# Altium PCB TU_ADV_PCB.PcbDoc (part 1 of 2)
Units mm, origin at the board's own origin, x right, y up, seen from the top; angles counter-clockwise.
Board outline 184 x 161.42 mm, 2 copper layers (Top Layer, Bottom Layer); 166 components, 184 nets, 467 pads, 141 vias.
Unrouted connection lines stored in the file: 268.
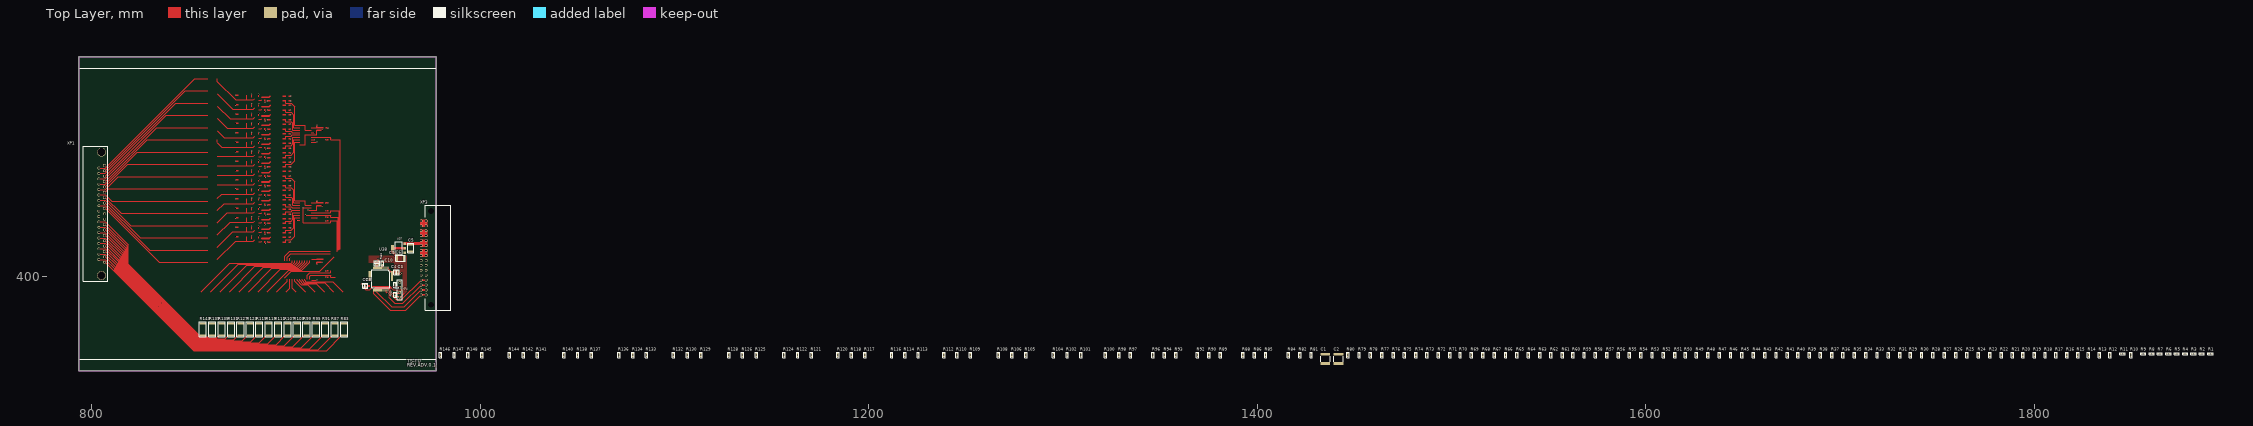
[diagram p0: Top Layer view]
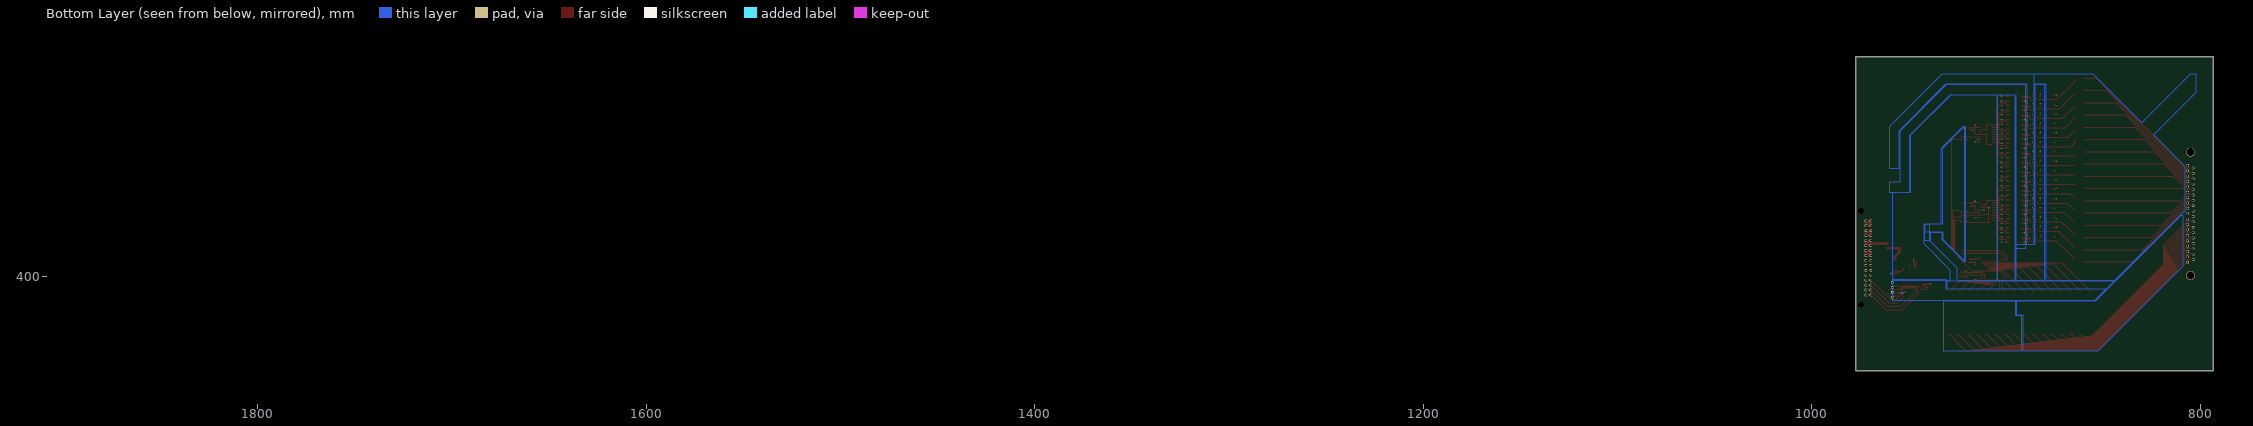
[diagram p1: Bottom Layer view, seen from below]

## Layer stack, top to bottom
Top Solder: solder mask 0.0102, Solder Resist, Dk 3.5
Top Layer: signal copper 0.0356
Dielectric 1: dielectric 0.32, FR-4, Dk 4.8
Bottom Layer: signal copper 0.0356
Bottom Solder: solder mask 0.0102, Solder Resist, Dk 3.5

## Board outline
793.56,351.548 793.56,512.971 977.56,512.971 977.56,352.698 977.56,351.548

## Design rules (kind name [scope] priority, off if disabled: settings)
BoardOutlineClearance [All] p1: gap=0.3 ignorepadtopadclearanceinfootprint=FALSE
Clearance Clearance_MultiLayerPad [OnLayer('Multi-Layer') and IsPad] p1: gap=0.2 ignorepadtopadclearanceinfootprint=FALSE except(0: Arc-Hole Track-Hole SMDPad-Hole THPad-Hole Via-Hole Fill-Hole Poly-Hole Region-Hole Text-Hole)
Clearance Clearance_Polygon [InPolygon] p2: gap=0.1 ignorepadtopadclearanceinfootprint=FALSE except(0: Arc-Hole Track-Hole SMDPad-Hole THPad-Hole Via-Hole Fill-Hole Poly-Hole Region-Hole Text-Hole)
Clearance [All] p3: gap=0.1 ignorepadtopadclearanceinfootprint=FALSE except(0: Arc-Hole Track-Hole SMDPad-Hole THPad-Hole Via-Hole Fill-Hole Poly-Hole Region-Hole Text-Hole)
ComponentClearance [All] p1: gap=0.5 collisioncheckmode=3 verticalgap=0.5 showdistances=FALSE
DiffPairsRouting [All] p1: maxlimit=0.3 minlimit=0.1 mostfreqgap=0.15 toplayer_minwidth=0.1 toplayer_maxwidth=0.3 toplayer_prefwidth=0.15 bottomlayer_minwidth=0.1 bottomlayer_maxwidth=0.3 bottomlayer_prefwidth=0.15 maxuncoupledlength=12.7
Height [All] p1: minheight=0 maxheight=50 prefheight=12.7
HoleSize [All] p1: absolutevalues=TRUE maxlimit=10 minlimit=0.3 maxpercent=80.000 minpercent=20.000
HoleToHoleClearance [All] p1: gap=0.3 allowstackedmicrovias=TRUE
MinimumSolderMaskSliver [All] p1: minsoldermaskwidth=0.2
PlaneClearance [All] p1: clearance=0.5
PlaneConnect [All] p1: planeconnectstyle=Relief reliefexpansion=0.5 reliefentries=4 reliefconductorwidth=0.2 reliefairgap=0.2
PolygonConnect PolygonConnect_PadGND [InNet('GND') and IsPad] p1: connectstyle=Relief reliefconductorwidth=0.2 reliefentries=4 polygonreliefangle="90 Angle" airgapwidth=0.2
PolygonConnect PolygonConnect_Via [IsVia] p2: connectstyle=Direct reliefconductorwidth=0.254 reliefentries=4 polygonreliefangle="90 Angle" airgapwidth=0.254
PolygonConnect [All] p3: connectstyle=Relief reliefconductorwidth=0.2 reliefentries=4 polygonreliefangle="90 Angle" airgapwidth=0.2
RoutingVias [All] p1: holewidth=0.2 width=0.4 viastyle="Through Hole" minholewidth=0.2 minwidth=0.4 maxholewidth=0.5 maxwidth=1.2
SilkToSolderMaskClearance [IsPad] p1: minsilkscreentomaskgap=0.2 clearancetoexposedcopper=TRUE
SolderMaskExpansion [All] p1: expansion=0.075 istentingtop=FALSE
Width [All] p1: maxlimit=10 minlimit=0.1 preferedwidth=0.1
21 further rules are at their usual default settings.

## Classes and differential pairs
component class U_TU_PWR: C3 C4 C5 C6 C7 C8 C9 C10 U37 XP3
component class U_TU_MCU: R149 R150 R151 U38 XP4

## Components (designator, comment, footprint, x,y, rotation, side; value= is the part's Value field where it differs from the comment)
C1 "" "CAP: 2220" 1435.067,359.969 r0 top value="10uF, 25V, X7R"
C2 "" "CAP: 2220" 1441.827,359.969 r0 top value="10uF, 25V, X7R"
C3 "Cap_0603" "CAP: 0603" 957.756,402.25 r90 top value=4.7μF
C4 "Cap_0603" "CAP: 0603" 956.306,402.25 r90 top value=0.1μF
C5 "Ceramic capacitor, 10μF, X7R, ±10%, , 1210, -55...+125°C" "CAP: 1210" 964.281,414.639 r90 top value=10μF
C6 "Ceramic capacitor, 10μF, X7R, ±10%, , 1210, -55...+125°C" "CAP: 1210" 959.031,409.389 r180 top value=10μF
C7 "Cap_0603" "CAP: 0603" 940.106,395.25 r270 top value=4.7μF
C8 "Cap_0603" "CAP: 0603" 941.556,395.25 r270 top value=0.1μF
C9 "Cap_0603" "CAP: 0603" 946.931,407.575 r180 top value=4.7μF
C10 "Cap_0603" "CAP: 0603" 946.931,406.125 r180 top value=0.1μF
R1 "" "RES: 0603" 1890.586,360.229 r0 top value=10K
R2 "" "RES: 0603" 1886.166,360.229 r0 top value=2K
R3 "" "RES: 0603" 1881.876,360.229 r0 top value=1K
R4 "" "RES: 0603" 1877.586,360.229 r0 top value=10K
R5 "" "RES: 0603" 1873.296,360.229 r0 top value=10K
R6 "" "RES: 0603" 1869.006,360.229 r0 top value=10K
R7 "" "RES: 0603" 1864.586,360.229 r0 top value=2K
R8 "" "RES: 0603" 1860.296,360.229 r0 top value=1K
R9 "" "RES: 0603" 1856.006,360.229 r0 top value=10K
R10 "" "RES: 0603" 1849.766,359.579 r90 top value=10K
R11 "" "RES: 0603" 1845.346,360.229 r0 top value=10K
R12 "" "RES: 0603" 1838.976,359.579 r90 top value=2K
R13 "" "RES: 0603" 1833.516,359.579 r90 top value=1K
R14 "" "RES: 0603" 1827.926,359.579 r90 top value=10K
R15 "" "RES: 0603" 1822.336,359.579 r90 top value=10K
R16 "" "RES: 0603" 1816.746,359.579 r90 top value=10K
R17 "" "RES: 0603" 1811.156,359.579 r90 top value=2K
R18 "" "RES: 0603" 1805.566,359.579 r90 top value=1K
R19 "" "RES: 0603" 1799.976,359.579 r90 top value=10K
R20 "" "RES: 0603" 1794.126,359.579 r90 top value=10K
R21 "" "RES: 0603" 1788.796,359.579 r90 top value=10K
R22 "" "RES: 0603" 1782.946,359.579 r90 top value=2K
R23 "" "RES: 0603" 1777.096,359.579 r90 top value=1K
R24 "" "RES: 0603" 1771.246,359.579 r90 top value=10K
R25 "" "RES: 0603" 1765.396,359.579 r90 top value=10K
R26 "" "RES: 0603" 1759.546,359.579 r90 top value=10K
R27 "" "RES: 0603" 1753.696,359.579 r90 top value=2K
R28 "" "RES: 0603" 1747.847,359.579 r90 top value=1K
R29 "" "RES: 0603" 1736.147,359.579 r90 top value=10K
R30 "" "RES: 0603" 1741.997,359.579 r90 top value=10K
R31 "" "RES: 0603" 1730.817,359.579 r90 top value=10K
R32 "" "RES: 0603" 1724.967,359.579 r90 top value=2K
R33 "" "RES: 0603" 1719.117,359.579 r90 top value=1K
R34 "" "RES: 0603" 1713.267,359.579 r90 top value=10K
R35 "" "RES: 0603" 1707.417,359.579 r90 top value=10K
R36 "" "RES: 0603" 1701.567,359.579 r90 top value=10K
R37 "" "RES: 0603" 1695.847,359.579 r90 top value=2K
R38 "" "RES: 0603" 1689.997,359.579 r90 top value=1K
R39 "" "RES: 0603" 1684.147,359.579 r90 top value=10K
R40 "" "RES: 0603" 1678.297,359.579 r90 top value=10K
R41 "" "RES: 0603" 1672.967,359.579 r90 top value=10K
R42 "" "RES: 0603" 1667.117,359.579 r90 top value=2K
R43 "" "RES: 0603" 1661.267,359.579 r90 top value=1K
R44 "" "RES: 0603" 1655.417,359.579 r90 top value=10K
R45 "" "RES: 0603" 1649.567,359.579 r90 top value=10K
R46 "" "RES: 0603" 1643.717,359.579 r90 top value=10K
R47 "" "RES: 0603" 1637.867,359.579 r90 top value=2K
R48 "" "RES: 0603" 1632.017,359.579 r90 top value=1K
R49 "" "RES: 0603" 1626.167,359.579 r90 top value=10K
R50 "" "RES: 0603" 1620.317,359.579 r90 top value=10K
R51 "" "RES: 0603" 1614.987,359.579 r90 top value=10K
R52 "" "RES: 0603" 1609.137,359.579 r90 top value=2K
R53 "" "RES: 0603" 1603.287,359.579 r90 top value=1K
R54 "" "RES: 0603" 1597.437,359.579 r90 top value=10K
R55 "" "RES: 0603" 1591.587,359.579 r90 top value=10K
R56 "" "RES: 0603" 1585.867,359.579 r90 top value=10K
R57 "" "RES: 0603" 1580.017,359.579 r90 top value=2K
R58 "" "RES: 0603" 1574.167,359.579 r90 top value=1K
R59 "" "RES: 0603" 1568.317,359.579 r90 top value=10K
R60 "" "RES: 0603" 1562.467,359.579 r90 top value=10K
R61 "" "RES: 0603" 1557.137,359.579 r90 top value=10K
R62 "" "RES: 0603" 1551.287,359.579 r90 top value=2K
R63 "" "RES: 0603" 1545.437,359.579 r90 top value=1K
R64 "" "RES: 0603" 1539.587,359.579 r90 top value=10K
R65 "" "RES: 0603" 1533.737,359.579 r90 top value=10K
R66 "" "RES: 0603" 1527.887,359.579 r90 top value=10K
R67 "" "RES: 0603" 1522.037,359.579 r90 top value=2K
R68 "" "RES: 0603" 1516.187,359.579 r90 top value=1K
R69 "" "RES: 0603" 1510.337,359.579 r90 top value=10K
R70 "" "RES: 0603" 1504.487,359.579 r90 top value=10K
R71 "" "RES: 0603" 1499.157,359.579 r90 top value=10K
R72 "" "RES: 0603" 1493.307,359.579 r90 top value=2K
R73 "" "RES: 0603" 1487.457,359.579 r90 top value=1K
R74 "" "RES: 0603" 1481.737,359.579 r90 top value=10K
R75 "" "RES: 0603" 1475.887,359.579 r90 top value=10K
R76 "" "RES: 0603" 1470.037,359.579 r90 top value=10K
R77 "" "RES: 0603" 1464.187,359.579 r90 top value=2K
R78 "" "RES: 0603" 1458.337,359.579 r90 top value=1K
R79 "" "RES: 0603" 1452.487,359.579 r90 top value=10K
R80 "" "RES: 0603" 1446.637,359.579 r90 top value=10K
R81 "" "RES: 0603" 1427.787,359.579 r90 top value=10K
R82 "" "RES: 0603" 1421.937,359.579 r90 top value=10K
R83 "" "RES: 2512" 930.061,372.806 r90 top value=2K
R84 "" "RES: 0603" 1416.087,359.579 r90 top value=1K
R85 "" "RES: 0603" 1404.387,359.579 r90 top value=10K
R86 "" "RES: 0603" 1398.537,359.579 r90 top value=10K
R87 "" "RES: 2512" 925.211,372.806 r90 top value=2K
R88 "" "RES: 0603" 1392.687,359.579 r90 top value=1K
R89 "" "RES: 0603" 1380.987,359.579 r90 top value=10K
R90 "" "RES: 0603" 1375.137,359.579 r90 top value=10K
R91 "" "RES: 2512" 920.361,372.806 r90 top value=2K
R92 "" "RES: 0603" 1369.287,359.579 r90 top value=1K
R93 "" "RES: 0603" 1358.107,359.579 r90 top value=10K
R94 "" "RES: 0603" 1352.257,359.579 r90 top value=10K
R95 "" "RES: 2512" 915.511,372.806 r90 top value=2K
R96 "" "RES: 0603" 1346.407,359.579 r90 top value=1K
R97 "" "RES: 0603" 1334.707,359.579 r90 top value=10K
R98 "" "RES: 0603" 1328.857,359.579 r90 top value=10K
R99 "" "RES: 2512" 910.661,372.806 r90 top value=2K
R100 "" "RES: 0603" 1321.837,359.579 r90 top value=1K
R101 "" "RES: 0603" 1309.357,359.579 r90 top value=10K
R102 "" "RES: 0603" 1302.207,359.579 r90 top value=10K
R103 "" "RES: 2512" 905.811,372.806 r90 top value=2K
R104 "" "RES: 0603" 1295.187,359.579 r90 top value=1K
R105 "" "RES: 0603" 1280.887,359.579 r90 top value=10K
R106 "" "RES: 0603" 1273.737,359.579 r90 top value=10K
R107 "" "RES: 2512" 900.961,372.806 r90 top value=2K
R108 "" "RES: 0603" 1266.717,359.579 r90 top value=1K
R109 "" "RES: 0603" 1252.417,359.579 r90 top value=10K
R110 "" "RES: 0603" 1245.528,359.579 r90 top value=10K
R111 "" "RES: 2512" 896.111,372.806 r90 top value=2K
R112 "" "RES: 0603" 1238.768,359.579 r90 top value=1K
R113 "" "RES: 0603" 1225.508,359.579 r90 top value=10K
R114 "" "RES: 0603" 1218.618,359.579 r90 top value=10K
R115 "" "RES: 2512" 891.261,372.806 r90 top value=2K
R116 "" "RES: 0603" 1211.858,359.579 r90 top value=1K
R117 "" "RES: 0603" 1198.078,359.579 r90 top value=10K
R118 "" "RES: 0603" 1191.188,359.579 r90 top value=10K
R119 "" "RES: 2512" 886.411,372.806 r90 top value=2K
R120 "" "RES: 0603" 1184.168,359.579 r90 top value=1K
R121 "" "RES: 0603" 1170.648,359.579 r90 top value=10K
R122 "" "RES: 0603" 1163.498,359.579 r90 top value=10K
R123 "" "RES: 2512" 881.561,372.806 r90 top value=2K
R124 "" "RES: 0603" 1156.478,359.579 r90 top value=1K
R125 "" "RES: 0603" 1142.178,359.579 r90 top value=10K
R126 "" "RES: 0603" 1135.028,359.579 r90 top value=10K
R127 "" "RES: 2512" 876.711,372.806 r90 top value=2K
R128 "" "RES: 0603" 1128.008,359.579 r90 top value=1K
R129 "" "RES: 0603" 1113.708,359.579 r90 top value=10K
R130 "" "RES: 0603" 1106.688,359.579 r90 top value=10K
R131 "" "RES: 2512" 871.861,372.806 r90 top value=2K
R132 "" "RES: 0603" 1099.538,359.579 r90 top value=1K
R133 "" "RES: 0603" 1085.758,359.579 r90 top value=10K
R134 "" "RES: 0603" 1078.738,359.579 r90 top value=10K
R135 "" "RES: 2512" 867.011,372.806 r90 top value=2K
R136 "" "RES: 0603" 1071.588,359.579 r90 top value=1K
R137 "" "RES: 0603" 1057.288,359.579 r90 top value=10K
R138 "" "RES: 0603" 1050.268,359.579 r90 top value=10K
R139 "" "RES: 2512" 862.161,372.806 r90 top value=2K
R140 "" "RES: 0603" 1043.118,359.579 r90 top value=1K
R141 "" "RES: 0603" 1029.468,359.579 r90 top value=10K
R142 "" "RES: 0603" 1022.318,359.579 r90 top value=10K
R143 "" "RES: 2512" 857.311,372.806 r90 top value=2K
R144 "" "RES: 0603" 1015.168,359.579 r90 top value=1K
R145 "" "RES: 0603" 1000.998,359.579 r90 top value=10K
R146 "" "RES: 0603" 979.678,359.579 r90 top value=10K
R147 "" "RES: 0603" 986.698,359.579 r90 top value=10K
R148 "" "RES: 0603" 993.848,359.579 r90 top value=10K
R149 "Resistor_0603" "RES: 0603" 956.306,395.7 r270 top value=10K
R150 "Resistor_0603" "RES: 0603" 956.306,390.62 r270 top value=10K
R151 "Resistor_0603" "RES: 0603" 949.681,406.825 r270 top value=10K
U37 "LD1117S33CTR4" SOT-223-3 958.081,414.639 r90 top
U38 "STM32F030R8T6TR" LQFP-64 948.931,398.75 r270 top
XP1 "DRB-37FA(DS1037-37F)" DRB-37FA(DS1037-37F) 800.41,432.259 r180 top
XP3 "DS1118-32M-R23" DS1118-32M-R23 972.221,390.509 r90 top
XP4 "PLS-6 (DS1021-1x6)" "PLS-4 (DS1021-1x4)" 958.635,393.16 r0 top

## Footprints (in the part's own frame and the unit in brackets; to place one, negate y for a bottom-side part, rotate by r counter-clockwise, add the part's x,y. Pads: shape width x height; smd on the part's side, far side on the other; paste and mask are expansions set on the pad)
"CAP: 0603" [mm]
  rect 0.85x0.85 smd: 1(-0.7,0) 2(0.7,0)
  silkscreen extent -1.33,-0.63 1.33,0.63, body extent -0.8,-0.4 0.8,0.4, height 0.3
"CAP: 1210" [mm]
  rect 1.1x2.6 smd: 1(-1.75,0) 2(1.75,0)
  silkscreen extent -2.5,-1.5 2.5,1.5, body extent -2,-1.24 2,1.24, height 1.7
"CAP: 2220" [mm]
  rect 5x1.5 smd: 1(0,0) 2(0,-4.8)
  silkscreen extent -2.5,-3.75 2.5,-1, body extent -2.5,-5.25 2.5,0.45, height 2.3
DRB-37FA(DS1037-37F) [mm] "DRB-37FA(DS1037-37F)"
  round 1.4 hole 1: 1(-6.19,24.93) 2(-6.19,22.16) 3(-6.19,19.39) 4(-6.19,16.62) 5(-6.19,13.85) 6(-6.19,11.08) 7(-6.19,8.31) 8(-6.19,5.54) 9(-6.19,2.77) 10(-6.19,0) 11(-6.19,-2.77) 12(-6.19,-5.54) 13(-6.19,-8.31) 14(-6.19,-11.08) 15(-6.19,-13.85) 16(-6.19,-16.62) 17(-6.19,-19.39) 18(-6.19,-22.16) 19(-6.19,-24.93) 20(-3.35,23.545) 21(-3.35,20.775) 22(-3.35,18.005) 23(-3.35,15.235) 24(-3.35,12.465) 25(-3.35,9.695) 26(-3.35,6.925) 27(-3.35,4.155) 28(-3.35,1.385) 29(-3.35,-1.385) 30(-3.35,-4.155) 31(-3.35,-6.925) 32(-3.35,-9.695) 33(-3.35,-12.465) 34(-3.35,-15.235) 35(-3.35,-18.005) 36(-3.35,-20.775) 37(-3.35,-23.545)
  round 4.5 hole 4: ""(-4.75,31.75) ""(-4.75,-31.75)
  silkscreen extent -7.85,-34.66 4.65,34.66, body extent -1.05,-34.66 13.15,34.66, height 12.61
DS1118-32M-R23 [mm] "DS1118-32M-R23"
  round 1.4 hole 1: 1(0,0) 2(2.54,0) 3(5.08,0) 4(7.62,0) 5(10.16,0) 6(12.7,0) 7(15.24,0) 8(17.78,0) 9(20.32,0) 10(22.86,0) 11(25.4,0) 12(27.94,0) 13(30.48,0) 14(33.02,0) 15(35.56,0) 16(38.1,0) 17(38.1,2.54) 18(35.56,2.54) 19(33.02,2.54) 20(30.48,2.54) 21(27.94,2.54) 22(25.4,2.54) 23(22.86,2.54) 24(20.32,2.54) 25(17.78,2.54) 26(15.24,2.54) 27(12.7,2.54) 28(10.16,2.54) 29(7.62,2.54) 30(5.08,2.54) 31(2.54,2.54) 32(0,2.54)
  round 2 hole 3: ""(-5.08,-2.54) ""(43.18,-2.54)
  silkscreen extent -7.95,-12.64 46.05,0.36, body extent -7.95,-12.64 46.05,2.84, height 6.87
LQFP-64 [mm] "LQFP-64"
  rect 1.2x0.3 smd: 1(-5.75,3.75) 2(-5.75,3.25) 3(-5.75,2.75) 4(-5.75,2.25) 5(-5.75,1.75) 6(-5.75,1.25) 7(-5.75,0.75) 8(-5.75,0.25) 9(-5.75,-0.25) 10(-5.75,-0.75) 11(-5.75,-1.25) 12(-5.75,-1.75) 13(-5.75,-2.25) 14(-5.75,-2.75) 15(-5.75,-3.25) 16(-5.75,-3.75) 33(5.75,-3.75) 34(5.75,-3.25) 35(5.75,-2.75) 36(5.75,-2.25) 37(5.75,-1.75) 38(5.75,-1.25) 39(5.75,-0.75) 40(5.75,-0.25) 41(5.75,0.25) 42(5.75,0.75) 43(5.75,1.25) 44(5.75,1.75) 45(5.75,2.25) 46(5.75,2.75) 47(5.75,3.25) 48(5.75,3.75)
  rect 0.3x1.2 smd: 17(-3.75,-5.75) 18(-3.25,-5.75) 19(-2.75,-5.75) 20(-2.25,-5.75) 21(-1.75,-5.75) 22(-1.25,-5.75) 23(-0.75,-5.75) 24(-0.25,-5.75) 25(0.25,-5.75) 26(0.75,-5.75) 27(1.25,-5.75) 28(1.75,-5.75) 29(2.25,-5.75) 30(2.75,-5.75) 31(3.25,-5.75) 32(3.75,-5.75) 49(3.75,5.75) 50(3.25,5.75) 51(2.75,5.75) 52(2.25,5.75) 53(1.75,5.75) 54(1.25,5.75) 55(0.75,5.75) 56(0.25,5.75) 57(-0.25,5.75) 58(-0.75,5.75) 59(-1.25,5.75) 60(-1.75,5.75) 61(-2.25,5.75) 62(-2.75,5.75) 63(-3.25,5.75) 64(-3.75,5.75)
  silkscreen extent -4.61,-4.61 4.61,4.61, body extent -6,-6 6,6, height 1.61
"PLS-4 (DS1021-1x4)" [mm] "PLS-4 (DS1021-1x4)"
  round 1.4 hole 1: 1(0,3.81) 2(0,1.27) 3(0,-1.27) 4(0,-3.81)
  silkscreen extent -1.27,-5.08 1.27,5.08, body extent -1.27,-5.08 1.27,5.08, height 8.61
"RES: 0603" [mm]
  rect 0.85x0.85 smd: 1(-0.7,0) 2(0.7,0)
  silkscreen extent -1.33,-0.63 1.33,0.63, body extent -0.8,-0.4 0.8,0.4, height 0.44
"RES: 2512" [mm]
  rect 1x3.3 smd: 1(-3.1,0) 2(3.1,0)
  silkscreen extent -3.8,-1.85 3.8,1.85, body extent -3.17,-1.6 3.17,1.6, height 0.52
SOT-223-3 [mm] "SOT-223-3"
  rect 1.3x1.5 smd: 1(-2.3,-3.15) 2(0,-3.15) 3(2.3,-3.15)
  rect 3.3x1.5 smd: 4(0,3.15)
  silkscreen extent -3.25,-1.75 3.25,1.75, body extent -3.25,-3.5 3.25,3.5, height 1.81

## Part data
C1 C2: library part Ceramic_2220, Help URL=https://ru.mouser.com/ProductDetail/KEMET/C2220C106K3RACTU?qs=AiEy7T%252BpANdh8MDp0HivKw%3D%3D, Mount=2220, Name=Capacitor
C3 C7 C9: Package/Case=0603, Temperature=-55...+125°C(-55...+85°C), TypeDielectric=X7R(X5R), Voltage=25V, Product Category=Capacitors
C4 C8 C10: Package/Case=0603, Temperature=-55...+125°C(-55...+85°C), TypeDielectric=X7R(X5R), Voltage=16V, Product Category=Capacitors
C5 C6: library part Ceramic_1210, Manufacturer=Yageo, Package=1210, PartNumber=CC1210KKX7R9BB104, Temperature=-55...+125°C, Tolerance=±10%, TypeCapacitor="Ceramic capacitor", TypeDielectric=X7R, HelpURL=https://www.digikey.com/product-detail/en/yageo/CC1210KKX7R9BB104/311-4522-1-ND/8025611, ValueManufacturerPartNumber="Ceramic capacitor, 10μF, X7R, ±10%, , 1210, -55...+125°C"
R1 R2 R3 R4 R5 R6 R7 R8 R9 R10 R11 R12 R13 R14 R15 R16 R17 R18 R19 R20 R21 R22 R23 R24 R25 R26 R27 R28 R29 R30 R31 R32 R33 R34 R35 R36 R37 R38 R39 R40 R41 R42 R43 R44 R45 R46 R47 R48 R49 R50 R51 R52 R53 R54 R55 R56 R57 R58 R59 R60 R61 R62 R63 R64 R65 R66 R67 R68 R69 R70 R71 R72 R73 R74 R75 R76 R77 R78 R79 R80 R81 R82 R84 R85 R86 R88 R89 R90 R92 R93 R94 R96 R97 R98 R100 R101 R102 R104 R105 R106 R108 R109 R110 R112 R113 R114 R116 R117 R118 R120 R121 R122 R124 R125 R126 R128 R129 R130 R132 R133 R134 R136 R137 R138 R140 R141 R142 R144 R145 R146 R147 R148: library part Resistor_0603, Mount=0603, Name=Resistor
  R1 R4 R5 R6 R9 R10 R11 R14 R15 R16 R19 R20 R21 R24 R25 R26 R29 R30 R31 R34 R35 R36 R39 R40 R41 R44 R45 R46 R49 R50 R51 R54 R55 R56 R59 R60 R61 R64 R65 R66 R69 R70 R71 R74 R75 R76 R79 R80 R81 R82 R85 R86 R89 R90 R93 R94 R97 R98 R101 R102 R105 R106 R109 R110 R113 R114 R117 R118 R121 R122 R125 R126 R129 R130 R133 R134 R137 R138 R141 R142 R145 R146 R147 R148: Help URL=https://www.chipdip.by/product0/9000079736
  R2 R7 R12 R17 R22 R27 R32 R37 R42 R47 R52 R57 R62 R67 R72 R77: Help URL=https://www.chipdip.by/product0/9000079719
  R3 R8 R13 R18 R23 R28 R33 R38 R43 R48 R53 R58 R63 R68 R73 R78 R84 R88 R92 R96 R100 R104 R108 R112 R116 R120 R124 R128 R132 R136 R140 R144: Help URL=https://www.chipdip.by/product0/9000079676
R83 R87 R91 R95 R99 R103 R107 R111 R115 R119 R123 R127 R131 R135 R139 R143: library part Resistor_2512, Help URL=https://www.chipdip.by/product0/9000190147, Mount=2512, Name=Resistor
R149 R150 R151: Package/Case=0603, Power=0.1W, Temperature=-55...+125°C, Tolerance=±1%, Product Category=Resistors
U37: library part LD1117S33CTR, "LDO Voltage Regulator 3.3V 0.8A Positive", Manufacturer=STMicroelectronics, Package/Case=SOT-223-3, Datasheet=https://eu.mouser.com/datasheet/2/389/cd00000544-1795431.pdf, HelpURL=https://eu.mouser.com/ProductDetail/STMicroelectronics/LD1117S33CTR?qs=8u%2FLf1IQwKF9meFZLHfRog%3D%3D, Product Category="Voltage Regulators"
U38: "MCU Mainstream Arm Cortex-M0 Value line MCU 64 Kbytes of Flash , 48 MHz CPU", Manufacturer=STMicroelectronics, Package/Case=LQFP-64, Datasheet=https://www.st.com/resource/en/datasheet/stm32f030r8.pdf, HelpURL=https://eu.mouser.com/ProductDetail/STMicroelectronics/STM32F030R8T6TR?qs=s5SkPsIz10%252B%252B1w15QiyTpQ%3D%3D, Product Category=Microcontrollers
XP1: "Сonnector", Manufacturer=Connfly, Analogue="HARTING 09221326951(https://eu.mouser.com/ProductDetail/HARTING/09221326951?qs=Afqhj6cPmO9f0oVZo6yWiA%3D%3D)", Datasheet=http://en.connfly.group/static/upload/file/pdf/DS1118.pdf, HelpURL=https://www.chipdip.by/product/din41612r-ds1118-32m-r23, Product Category=Connectors
XP3: "DIN 41612 Connector", Manufacturer=Connfly, Analogue="HARTING 09221326951(https://eu.mouser.com/ProductDetail/HARTING/09221326951?qs=Afqhj6cPmO9f0oVZo6yWiA%3D%3D)", Datasheet=http://en.connfly.group/static/upload/file/pdf/DS1118.pdf, HelpURL=https://www.chipdip.by/product/din41612r-ds1118-32m-r23, Product Category=Connectors
XP4: library part "PLS-4 (DS1021-1x4)", "Board to Board, Surface Mount, Single row, 6 Positions, 2.54mm, Vertical.", Manufacturer=Connfly, Datasheet=https://static.chipdip.ru/lib/977/DOC005977245.pdf, HelpURL=https://www.chipdip.by/product/pls-4, Product Category=Connectors

## Via types
v1: diameter 0.7, hole 0.35, Top Layer to Bottom Layer, tented both sides, 138 vias
v2: diameter 0.85, hole 0.4, Top Layer to Bottom Layer, tented both sides, 3 vias

## Nets (pads, with @x,y where several pads share a name; then routed paths per layer and width w, separated by ;. In a path a pad name is that pad's centre, name@x,y a point inside that pad or via, vN(x,y) a via of type N, cw(c..) or ccw(c..) an arc to the next point about the centre after c; other vN are vias at no path point)
+5V: C5.2 U37.3 XP3.11 XP3.12 XP3.21 XP3.22 | length 10.2
  Top Layer w1.4: XP3.22@969.681,415.909 XP3.21@969.681,418.449 XP3.12@972.221,418.449 XP3.11@972.221,415.909 XP3.22@969.681,415.909
+12V: C1.2 XP3.15 XP3.16 XP3.17 XP3.18 | length 10.2
  Top Layer w1.4: XP3.18@969.681,426.069 XP3.15@972.221,426.069 XP3.16@972.221,428.609 XP3.17@969.681,428.609 XP3.18@969.681,426.069
+12V_CLEAR: C2.2 R5.1 R10.1 R15.1 R20.1 R25.1 R30.1 R35.1 R40.1 R45.1 R50.1 R55.1 R60.1 R65.1 R70.1 R75.1 R80.1 | length 29.5
  Top Layer w0.6: 882.534,429.245 v1(882.534,430.672) ; 882.534,448.645 v1(882.534,450.072) ; 882.534,468.045 v1(882.534,469.472)
  Top Layer w0.7: v1(889.108,450.918) 889.108,452.095 ; v1(889.108,475.168) 889.108,476.345 ; v1(890.378,432.125) 891.953,432.125 ; v1(890.378,436.975) 891.953,436.975 ; v1(890.378,441.825) 891.953,441.825 ; v1(890.378,446.675) 891.953,446.675 ; v1(890.378,451.525) 891.953,451.525 ; v1(890.378,456.375) 891.953,456.375 ; v1(890.378,461.225) 891.953,461.225 ; v1(890.378,466.075) 891.953,466.075 ; v1(890.378,470.925) 891.953,470.925 ; v1(890.378,475.775) 891.953,475.775 ; v1(890.378,480.625) 891.953,480.625 ; v1(890.378,485.475) 891.953,485.475 ; v1(890.378,490.325) 891.953,490.325 ; 901.428,458.915 v1(902.606,458.915) ; 901.428,483.165 v1(902.606,483.165)
E.GND1: R81.2 R85.2 R89.2 R93.2 R97.2 R101.2 R105.2 R109.2 XP1.9 | length 8.6
  Top Layer w0.3: 895.411,392.274 900.781,397.644 900.781,398.676
E.GND2: R113.2 R117.2 R121.2 R125.2 R129.2 R133.2 R137.2 R141.2 XP1.28
GND: C1.1 C2.1 C3.1 C4.1 C5.1 C6.1 C7.1 C8.1 C9.1 C10.1 R1.2 R3.1 R4.1 R6.2 R8.1 R9.1 R11.2 R13.1 R14.1 R16.2 R18.1 R19.1 R21.2 R23.1 R24.1 R26.2 R28.1 R29.1 R31.2 R33.1 R34.1 R36.2 R38.1 R39.1 R41.2 R43.1 R44.1 R46.2 R48.1 R49.1 R51.2 R53.1 R54.1 R56.2 R58.1 R59.1 R61.2 R63.1 R64.1 R66.2 R68.1 R69.1 R71.2 R73.1 R74.1 R76.2 R78.1 R79.1 R145.1 R146.1 R147.1 R148.1 R149.1 U37.1 U38.12 U38.31 U38.60 U38.63 XP1.29 XP3.9 XP3.10 XP3.23 XP3.24 XP4.1 | length 107.1
  Top Layer w0.3: 900.261,392.274 902.051,394.064 902.051,398.561 ; C8.1@941.556,395.95 942.006,395.5 U38.31@943.181,395.5 ; U38.12@947.181,404.5 947.181,405.675 C10.1@947.631,406.125 ; U38.63@954.681,402 955.856,402 C4.1@956.306,401.55
  Top Layer w0.55: v1(905.606,428.95) 907.281,428.95 ; v1(911.406,434.03) 913.081,434.03 916.026,434.03 916.026,436.44
  Top Layer w0.6: 882.534,477.745 v1(882.534,479.172) ; 882.534,482.595 v1(882.534,484.022) ; 882.534,487.445 v1(882.534,488.872) ; 882.534,492.295 v1(882.534,493.722) ; 886.034,419.795 v1(886.034,420.972) ; 886.034,424.645 v1(886.034,425.822) ; 886.034,429.495 v1(886.034,430.672) ; 886.034,434.345 v1(886.034,435.522) ; 886.034,439.195 v1(886.034,440.372) ; 886.034,444.045 v1(886.034,445.222) ; 886.034,448.895 v1(886.034,450.072) ; 886.034,453.745 v1(886.034,454.922) ; 886.034,458.595 v1(886.034,459.772) ; 886.034,463.445 v1(886.034,464.622) ; 886.034,468.295 v1(886.034,469.472) ; 886.034,473.145 v1(886.034,474.322) ; 886.034,477.995 v1(886.034,479.172) ; 886.034,482.845 v1(886.034,484.022) ; 886.034,487.695 v1(886.034,488.872) ; 886.034,492.545 v1(886.034,493.722)
  Top Layer w0.7: v1(874.134,420.57) 875.561,420.57 ; v1(874.134,425.42) 875.561,425.42 ; v1(874.134,430.27) 875.561,430.27 ; v1(874.134,435.12) 875.561,435.12 ; v1(874.134,439.97) 875.561,439.97 ; v1(874.134,444.82) 875.561,444.82 ; v1(874.134,449.67) 875.561,449.67 ; v1(874.134,454.52) 875.561,454.52 ; v1(874.134,459.37) 875.561,459.37 ; v1(874.134,464.22) 875.561,464.22 ; v1(874.134,469.07) 875.561,469.07 ; v1(874.134,473.92) 875.561,473.92 ; v1(874.134,478.77) 875.561,478.77 ; v1(874.134,483.62) 875.561,483.62 ; v1(874.134,488.47) 875.561,488.47 ; v1(874.134,493.32) 875.561,493.32 ; v1(889.108,441.218) 889.108,442.395 ; v1(889.108,446.068) 889.108,447.245 ; v1(889.108,465.468) 889.108,466.645 ; v1(889.108,470.318) 889.108,471.495 ; v1(889.108,489.718) 889.108,490.895 ; v1(890.378,427.275) 891.953,427.275 ; 898.453,429.815 900.028,429.815 ; 901.428,444.365 v1(902.606,444.365) ; 901.428,446.675 v1(902.606,446.675) ; 901.428,449.215 v1(902.606,449.215) ; 901.428,454.065 v1(902.606,454.065) ; 901.428,470.925 v1(902.606,470.925) ; 901.428,473.465 v1(902.606,473.465) ; 901.428,478.315 v1(902.606,478.315) ; 916.026,436.44 v1(918.778,436.44)
  Top Layer w0.85: v2(938.756,395.95) C7.1@940.106,395.95 C8.1@941.556,395.95 ; C10.1@947.631,406.125 C9.1@947.631,407.575 v2(947.631,408.925) ; C4.1@956.306,401.55 C3.1@957.756,401.55 v2(959.106,401.55)
  Top Layer w1.4: XP3.24@969.681,410.829 XP3.23@969.681,413.369 XP3.10@972.221,413.369 XP3.9@972.221,410.829 XP3.24@969.681,410.829
GND_12V: XP3.13 XP3.14 XP3.19 XP3.20 | length 10.2
  Top Layer w1.4: XP3.20@969.681,420.989 XP3.19@969.681,423.529 XP3.14@972.221,423.529 XP3.13@972.221,420.989 XP3.20@969.681,420.989
GPIO_TU_1: R1.1 | length 28.5
  Top Layer w0.3: 900.028,490.325 900.028,489.285 902.75,489.285 904.592,487.443 904.592,477.91 910.136,477.91 910.136,475.37 913.081,475.37
  Top Layer w0.7: 898.453,490.325 900.028,490.325
GPIO_TU_2: R6.1 | length 16.9
  Top Layer w0.3: 900.028,485.475 900.028,484.435 902.75,484.435 904.092,483.093 904.092,476.64 907.281,476.64
  Top Layer w0.7: 898.453,485.475 900.028,485.475
GPIO_TU_3: R11.1 | length 13.6
  Top Layer w0.3: 900.028,480.625 900.028,479.585 902.75,479.585 903.592,478.743 903.592,475.37 907.281,475.37
  Top Layer w0.7: 898.453,480.625 900.028,480.625
GPIO_TU_4: R16.1 | length 11.3
  Top Layer w0.3: 900.028,475.775 900.028,474.735 902.75,474.735 903.385,474.1 907.281,474.1
  Top Layer w0.7: 898.453,475.775 900.028,475.775 ; 901.428,488.015 v1(902.606,488.015)
GPIO_TU_5: R21.1 | length 11.5
  Top Layer w0.3: 900.028,470.925 900.028,472.195 902.75,472.195 903.385,472.83 907.281,472.83
  Top Layer w0.7: v1(889.108,480.018) 889.108,481.195 ; 898.453,470.925 900.028,470.925
GPIO_TU_6: R26.1 | length 13.8
  Top Layer w0.3: 900.028,466.075 900.028,467.345 902.75,467.345 903.606,468.201 903.606,471.56 907.281,471.56
  Top Layer w0.7: 898.453,466.075 900.028,466.075
GPIO_TU_7: R31.1 | length 17.1
  Top Layer w0.3: 900.028,461.225 900.028,462.495 902.75,462.495 904.106,463.851 904.106,470.29 907.281,470.29
  Top Layer w0.7: 898.453,461.225 900.028,461.225
GPIO_TU_8: R36.1 | length 21.6
  Top Layer w0.3: 900.028,456.375 900.028,457.645 902.75,457.645 904.606,459.501 904.606,469.02 907.281,469.02
  Top Layer w0.7: 898.453,456.375 900.028,456.375 ; 901.428,463.765 v1(902.606,463.765)
GPIO_TU_9: R41.1 | length 32.6
  Top Layer w0.3: 900.028,451.525 900.028,450.485 902.75,450.485 904.592,448.643 904.592,439.11 ; 907.484,439.11 904.592,439.11 ; 913.081,436.57 910.136,436.57 910.136,439.11 904.592,439.11
  Top Layer w0.7: v1(889.108,455.768) 889.108,456.945 ; 898.453,451.525 900.028,451.525
GPIO_TU_10: R46.1 | length 16.9
  Top Layer w0.3: 900.028,446.675 900.028,445.635 902.75,445.635 904.092,444.293 904.092,437.84 907.281,437.84
  Top Layer w0.7: 898.453,446.675 900.028,446.675
GPIO_TU_11: R51.1 | length 13.6
  Top Layer w0.3: 900.028,441.825 900.028,440.785 902.75,440.785 903.592,439.943 903.592,436.57 907.281,436.57
  Top Layer w0.7: 898.453,441.825 900.028,441.825
GPIO_TU_12: R56.1 | length 11.3
  Top Layer w0.3: 900.028,436.975 900.028,435.935 902.75,435.935 903.385,435.3 907.281,435.3
  Top Layer w0.7: 898.453,436.975 900.028,436.975 ; 901.428,439.515 v1(902.606,439.515)
GPIO_TU_13: R61.1 | length 11.5
  Top Layer w0.3: 900.028,432.125 900.028,433.395 902.75,433.395 903.385,434.03 907.281,434.03
  Top Layer w0.7: 898.453,432.125 900.028,432.125 ; 901.428,434.665 v1(902.606,434.665)
GPIO_TU_14: R66.1 | length 15
  Top Layer w0.3: 900.028,427.275 900.028,428.545 902.75,428.545 903.606,429.401 903.606,432.76 907.281,432.76
  Top Layer w0.7: 898.453,427.275 900.028,427.275 ; 901.428,429.815 v1(902.606,429.815)
GPIO_TU_15: R71.1 | length 18.3
  Top Layer w0.3: 900.028,422.425 900.028,423.695 902.75,423.695 904.106,425.051 904.106,431.49 907.281,431.49
  Top Layer w0.7: 898.453,422.425 900.028,422.425 ; 901.428,424.965 v1(902.606,424.965)
GPIO_TU_16: R76.1 | length 21.6
  Top Layer w0.3: 900.028,417.575 900.028,418.845 902.75,418.845 904.606,420.701 904.606,430.22 907.281,430.22
  Top Layer w0.7: 898.453,417.575 900.028,417.575 ; 901.428,420.115 v1(902.606,420.115)
I0: R82.2 | length 1.6
  Top Layer w0.7: v1(890.378,422.425) 891.953,422.425
I1: R86.2 | length 1.6
  Top Layer w0.7: v1(890.378,417.575) 891.953,417.575
I2: R90.2 | length 7
  Top Layer w0.3: 903.321,398.561 903.321,394.064 905.111,392.274
I3: R94.2
I4: R98.2
I5: R102.2
I6: R106.2
I7: R110.2
I8: R114.2
I9: R118.2
I10: R122.2
I11: R126.2
I12: R130.2
I13: R134.2
I14: R138.2
I15: R142.2
IDI_0: R83.1 XP1.1 | length 145.5
  Top Layer w0.3: XP1.1@806.6,407.329 807.174,407.329 852.647,361.856 921.061,361.856 928.911,369.706 R83.1@930.061,369.706